# EAGLE board V0p2_Main_PCB2 (EAGLE 6.4)
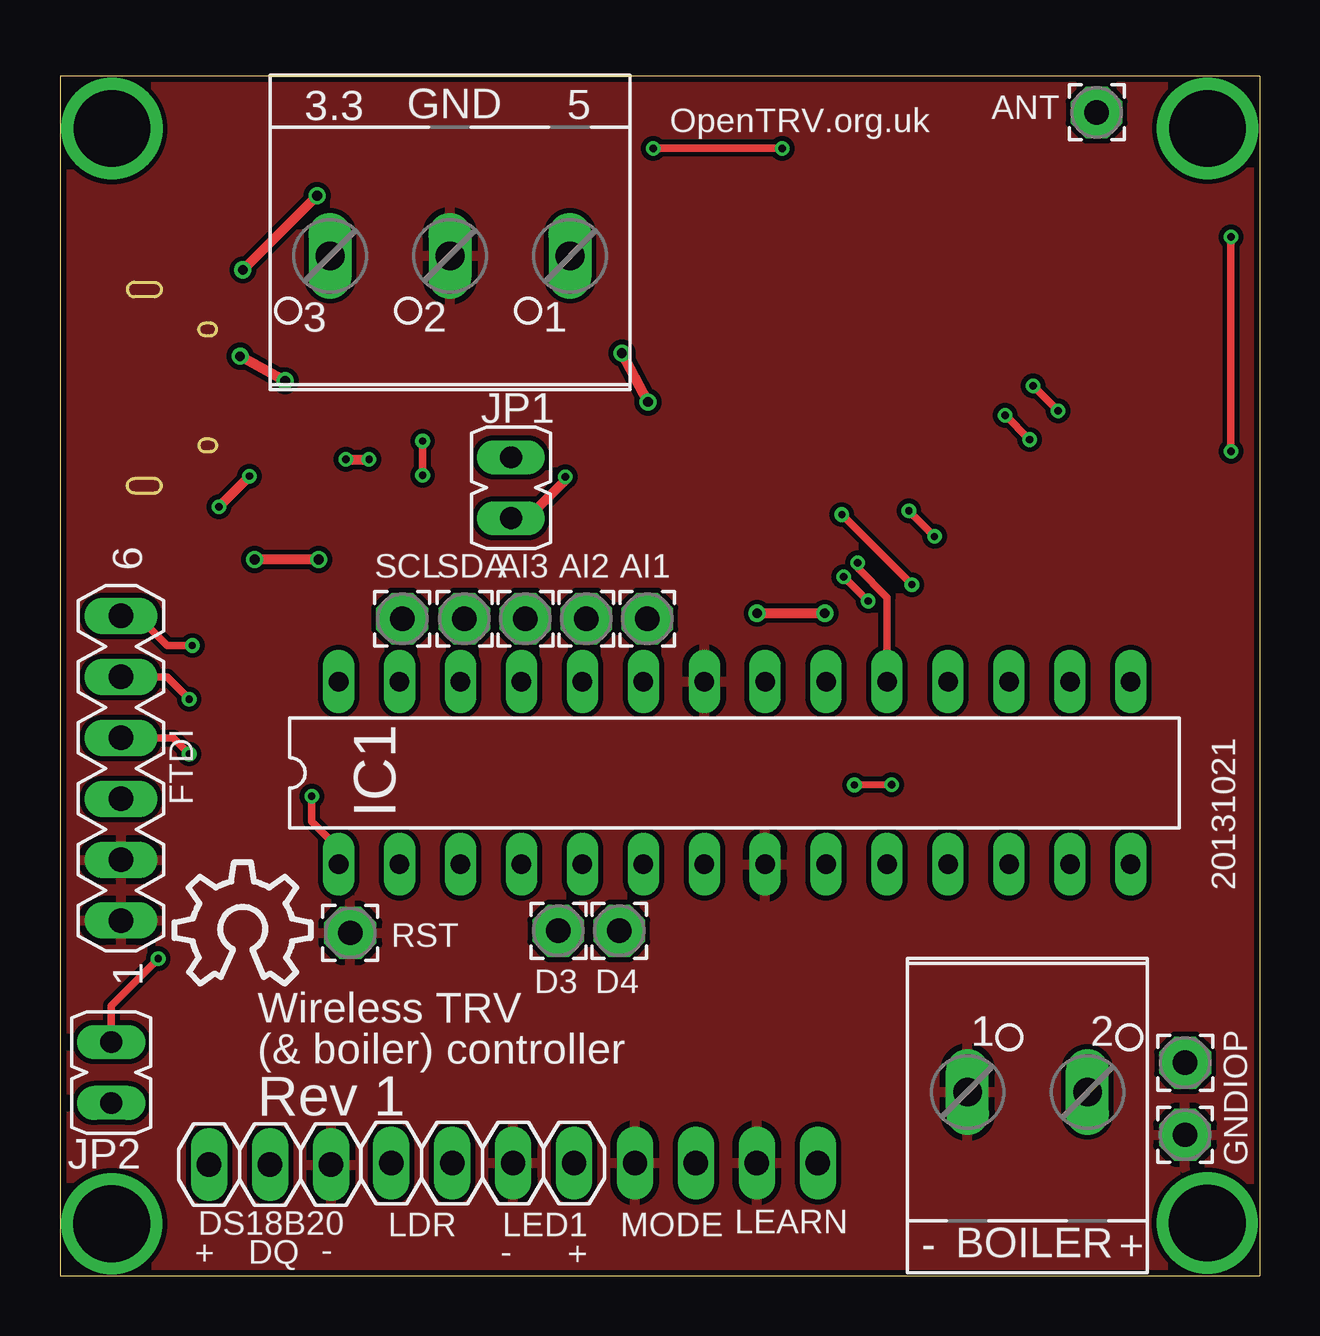
[diagram p0: board, top side]
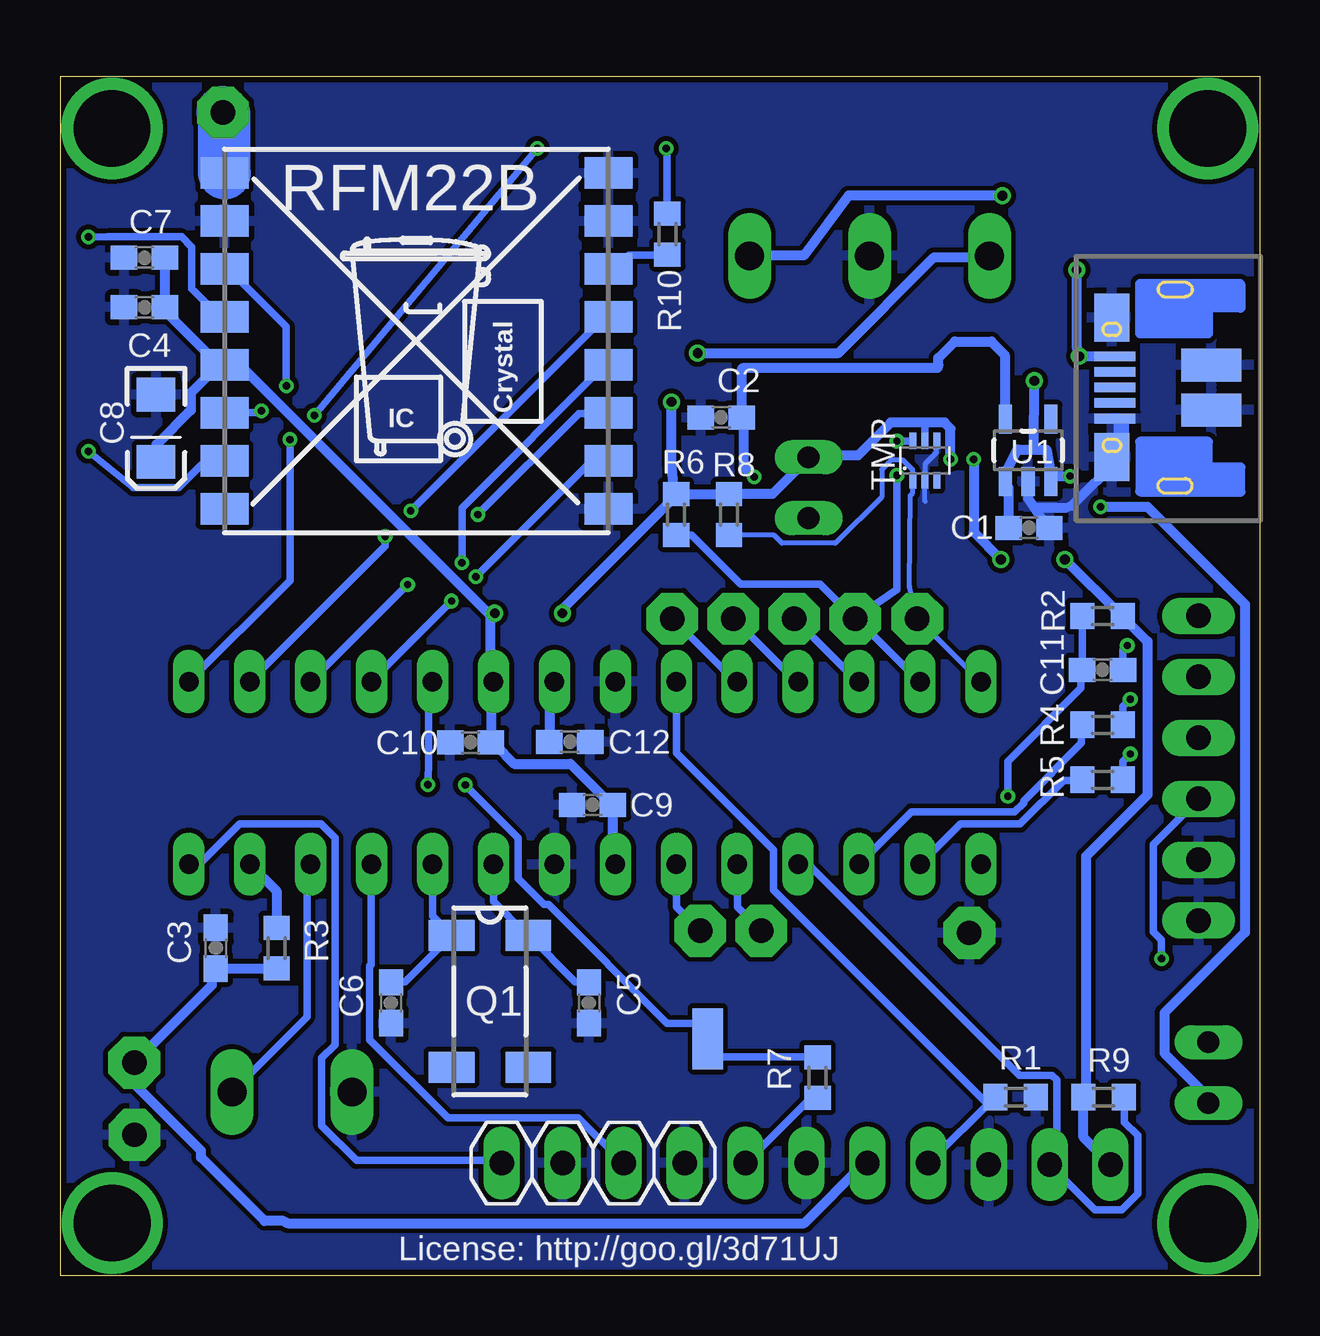
[diagram p1: board, bottom side, seen from below]

Size 50 x 50 mm. Coordinates in mm from the lower left corner, seen from the top.
Outline: 0,0 50,0 50,50 0,50 0,0
Copper layers (1*16): Top 0.035mm / dielectric 1.5mm / Bottom 0.035mm
Design rules "PMServicesStd": minimum track width 8mil, minimum drill 12mil, track to track 8mil, track to pad 8mil, pad to pad 8mil, via to via 8mil, smd to smd 0mil, copper to edge 10mil, drill to drill 10mil, minimum pad ring 10mil, minimum via ring 6mil, stop-mask expansion 2mil, vias tented up to drill 100mil, thermal gap 10mil
Net classes: 0 default: width 0.305 mm; 1 supply: width 0.406 mm, clearance 0.203 mm; 2 mains: width 1.626 mm, clearance 4.064 mm; 3 ant: width 2.184 mm; 4 tmp: width 0.152 mm

## Footprints (pad centres in the part's own frame; a part is rotated, then mirrored left to right if it is on the bottom)
2,15/1,0 = drill 1.016 pad 2.159 octagon: 1 0,0
SCREWTERMINAL = drill 1.194 long: 1 -2.5,0; 2 2.5,0
0603-CAP = smd 1.1 x 1: 1 -0.85,0; 2 0.85,0
EIA3216 = smd 1.4 x 1.6: A 1.4,0; C -1.4,0
1X03 = drill 1.016 long: 1 -2.54,0; 2 0,0; 3 2.54,0
MA06-1 = drill 1.016 long: 1 -6.35,0; 2 -3.81,0; 3 -1.27,0; 4 1.27,0; 5 3.81,0; 6 6.35,0
DIL28-3 = drill 0.813 long: 1 -16.51,-3.81; 2 -13.97,-3.81; 3 -11.43,-3.81; 4 -8.89,-3.81; 5 -6.35,-3.81; 6 -3.81,-3.81; 7 -1.27,-3.81; 8 1.27,-3.81; 9 3.81,-3.81; 10 6.35,-3.81; 11 8.89,-3.81; 12 11.43,-3.81; 13 13.97,-3.81; 14 16.51,-3.81; 15 16.51,3.81; 16 13.97,3.81; 17 11.43,3.81; 18 8.89,3.81; 19 6.35,3.81; 20 3.81,3.81; 21 1.27,3.81; 22 -1.27,3.81; 23 -3.81,3.81; 24 -6.35,3.81; 25 -8.89,3.81; 26 -11.43,3.81; 27 -13.97,3.81; 28 -16.51,3.81
JP1 = drill 0.914 long: 1 0,-1.27; 2 0,1.27
1X02 = drill 1.016 long: 1 -1.27,0; 2 1.27,0
SCREWTERMINAL' = drill 1.194 long: 1 -2.5,0; 2 2.5,0; 3 7.5,0
MC-306 = smd 1.3 x 1.9: 1 -2.75,-1.6; 2 2.75,-1.6; 3 2.75,1.6; 4 -2.75,1.6
R0603 = smd 1 x 1.1: 1 -0.85,0; 2 0.85,0
RFM22-XXX-S2 = smd 2 x 1.3: 1 -8,7; 2 -8,5; 3 -8,3; 4 -8,1; 5 -8,-1; 6 -8,-3; 7 -8,-5; 8 -8,-7; 9 8,-7; 10 8,-5; 11 8,-3; 12 8,-1; 13 8,1; 14 8,3; 15 8,5; 16 8,7
SHORT_TOP-50 = smd 1.27 x 1.27: 1 0.635,0; 2 -0.635,0
TMP112 = smd 0.285 x 0.7: 1 -0.5,-0.825; 2 0,-0.825; 3 0.5,-0.825; 4 0.5,0.825; 5 0,0.825; 6 -0.5,0.825
TC1185 = smd 0.55 x 1.2: 1 -0.95,-1.3; 2 0,-1.3; 3 0.95,-1.3; 4 0.95,1.3; 5 -0.95,1.3
MICRO-USB-FCI-10103592 = smd 0.4 x 1.71: 1 3.84,2.51; 2 3.19,2.51; 3 2.54,2.51; 4 1.89,2.51; 5 1.24,2.51 | smd 2 x 1.46: 7 -0.36,2.64; 17 5.44,2.64 | smd 1.375 x 2.5: 11 1.603,-1.52; 12 3.478,-1.52

## Placement (x,y rotation side)
AI1  [2,15/1,0]  24.48,27.38 0 top
AI2  [2,15/1,0]  21.94,27.38 0 top
AI3  [2,15/1,0]  19.4,27.38 0 top
ANT  ANT (86 mm)  [2,15/1,0]  43.21,48.49 180 top
BOILER  [SCREWTERMINAL]  40.32,7.66 0 top
C1  10uF 10V  [0603-CAP]  9.61,31.17 0 bottom
C2  10uF 10V  [0603-CAP]  22.44,35.77 0 bottom
C3  100nF  [0603-CAP]  43.51,13.65 270 bottom
C4  100pF  [0603-CAP]  46.48,40.37 180 bottom
C5  0pF  [0603-CAP]  27.95,11.37 270 bottom
C6  0pF  [0603-CAP]  36.2,11.37 270 bottom
C7  100nF  [0603-CAP]  46.48,42.43 0 bottom
C8  100uF  [EIA3216]  45.99,35.32 270 bottom
C9  100nF  [0603-CAP]  27.8,19.63 180 bottom
C10  100nF  [0603-CAP]  32.88,22.23 180 bottom
C11  100nF  [0603-CAP]  6.54,25.25 0 bottom
C12  100nF  [0603-CAP]  28.75,22.25 0 bottom
D3  [2,15/1,0]  20.77,14.37 0 top
D4  [2,15/1,0]  23.31,14.37 0 top
DS18B20  [1X03]  8.75,4.62 0 top
FTDI  FTDI  [MA06-1]  2.54,21.15 90 top
GND  [2,15/1,0]  46.89,5.87 0 top
IC1  ATMEGA328P-PU  [DIL28-3]  28.12,20.95 0 top
IOP  [2,15/1,0]  46.9,8.88 0 top
JP1  [JP1]  18.8,32.84 0 top
JP2  [JP1]  2.13,8.46 180 top
LDR  [1X02]  15.07,4.7 0 top
LEARN  [1X02]  30.32,4.7 0 bottom
LED1  [1X02]  20.16,4.7 0 top
MODE  [1X02]  25.23,4.7 0 bottom
POWER  [SCREWTERMINAL']  18.76,42.51 180 top
Q1  32768Hz  [MC-306]  32.08,11.43 270 bottom
R1  100K  [R0603]  10.17,7.44 0 bottom
R2  10K  [R0603]  6.54,27.5 180 bottom
R3  330R  [R0603]  40.97,13.65 270 bottom
R4  10K  [R0603]  6.54,22.96 0 bottom
R5  10K  [R0603]  6.54,20.67 0 bottom
R6  4K7  [R0603]  24.32,31.73 270 bottom
R7  470R  [R0603]  18.43,8.26 270 bottom
R8  4K7  [R0603]  22.11,31.73 90 bottom
R9  4.7K  [R0603]  6.5,7.44 180 bottom
R10  1K  [R0603]  24.68,43.41 270 bottom
RFM22B  RFM22SMD  [RFM22-XXX-S2]  35.14,38.96 0 bottom
RST  [2,15/1,0]  12.1,14.29 270 top
SCL  [2,15/1,0]  14.26,27.38 0 top
SDA  [2,15/1,0]  16.86,27.38 0 top
SH1  SHORT-HT5  [SHORT_TOP-50]  23,9.88 90 bottom
TMP  TMP112  [TMP112]  13.95,33.97 0 bottom
U1  TC1185SMD  [TC1185]  9.65,34.4 0 bottom
U$1  [OSHW_10X200_NOTEXT]  4.77,12.16 0 top
U$2  [TONNE]  35.31,36.2 0 bottom
USBPOWER  MICRO-USB-FCI-10103592  [MICRO-USB-FCI-10103592]  3.52,34.48 90 bottom

## Library data of the parts
AI1-AI3 ANT D3 D4 GND IOP RST SCL SDA = wirepad
BOILER = screwterminal_new
C1-C12 = SparkFun-Passives
DS18B20 LDR LEARN LED1 MODE = pinhead
FTDI = FTDI; OC_FARNELL: unknown; OC_NEWARK: unknown
IC1 = Arduino-AVR
JP1 JP2 = jumper
POWER = screwterminal3_new
Q1 = crystal; MPN: MC-306 60.0KHZ 100PPM ,12.5PF; OC_FARNELL: 1278040; OC_NEWARK: 31M5576
R1-R10 = resistor
RFM22B = SparkFun-RF
SH1 = shorts; BOM: no
TMP = TMP112
U1 = 3.3VREG
U$1 = ohw-logo
U$2 = logo
USBPOWER = micro-usb-fci-10103592

## Nets
5V [supply]: C1.1 JP2.2 POWER.1 U1.1 U1.3 USBPOWER.1
AI1: AI1.1 IC1.24
AI2: AI2.1 IC1.25
AI3: AI3.1 IC1.26
BOILER: BOILER.2 IC1.12
BUTTON_LEARN_L: IC1.14 LEARN.1
BUTTON_MODE_L: IC1.11 MODE.1
D2: DS18B20.2 IC1.4 R9.1
D3: D3.1 IC1.5
D4: D4.1 IC1.6
GND [tmp]: BOILER.1 C1.2 C2.1 C3.1 C4.2 C5.2 C6.2 C7.1 C8.C C9.2 C10.2 C12.2 DS18B20.3 FTDI.1 FTDI.2 GND.1 IC1.8 IC1.22 LEARN.2 LED1.1 MODE.2 POWER.2 R1.2 RFM22B.2 RFM22B.9 RFM22B.15 RFM22B.16 RST.1 TMP.2 TMP.4 U1.2 USBPOWER.5 USBPOWER.7 USBPOWER.11 USBPOWER.12 USBPOWER.17
IO_POWER [supply]: C3.2 IOP.1 LDR.2 R3.2
IO_POWER_UP [supply]: IC1.13 R3.1
LDR: IC1.23 LDR.1 R1.1
LED_HEATCALL: R7.1 SH1.2
LEDEXT: LED1.2 R7.2
N$1: C11.2 FTDI.6
N$3: FTDI.4 R5.2
N$5: FTDI.5 R4.2
N$6 [supply]: C12.1 IC1.21
N$7: R10.2 RFM22B.14
N$8 [supply]: C2.2 JP1.1 U1.5
N$11: FTDI.3 JP2.1
N$20: RFM22B.3 RFM22B.6
N$21: RFM22B.4 RFM22B.7
N$26 [ant]: ANT.1 RFM22B.1
RESET: C11.1 IC1.1 R2.2
RFM_IRQ: IC1.15 R10.1
RX: IC1.3 R4.1
SCL [tmp]: IC1.28 R8.1 SCL.1 TMP.1
SDA: IC1.27 R6.2 SDA.1 TMP.6
SPI_MISO: IC1.18 RFM22B.10
SPI_MOSI: IC1.17 RFM22B.11
SPI_NSS: IC1.16 RFM22B.13
SPI_SCK: IC1.19 RFM22B.12 SH1.1
TX: IC1.2 R5.1
VCC [supply]: C4.1 C7.2 C8.A C9.1 C10.1 DS18B20.1 IC1.7 IC1.20 JP1.2 POWER.3 R2.1 R6.1 R8.2 R9.2 RFM22B.5 TMP.5
XTAL1: C5.1 IC1.9 Q1.4
XTAL2: C6.1 IC1.10 Q1.1

## Tracks (layer width: path | path; a pad name or v marks a point on that pad's centre or on a via)
5V  (via drill 0.3, 0.41)
  Top 0.406: v9.38,37.3 v7.5,38.32 | v7.62,41.92 v10.72,45.02 | v7.9,33.33 v6.63,32.05
  Bottom 0.406: C1.1 10.46,31.19 10.46,32.84 10.59,32.97 U1.1 10.52,33.17 10.52,33.58 10.08,34.44 9.4,34.44 | 9.4,34.44 8.88,34.42 8.71,33.5 8.71,32.99 U1.3 8.53,33.33 v7.9,33.33 | 9.4,34.44 v9.38,37.3 | USBPOWER.1 6.11,38.32 v7.5,38.32 7.59,38.51 7.62,38.71 v7.62,41.92 | v10.72,45.02 17.13,45.02 19,42.52 21.23,42.52 POWER.1 | v6.63,32.05 4.67,32.05 0.61,27.99 0.61,14.3 3.96,10.95 3.96,9.27 2.13,7.44 2.13,7.21 JP2.2
AI1
  Bottom 0.305: IC1.24 21.84,24.77 24.46,27.38 AI1.1
AI2
  Bottom 0.305: IC1.25 19.3,24.77 21.92,27.38 AI2.1
AI3
  Bottom 0.305: IC1.26 16.76,24.77 19.38,27.38 AI3.1
BOILER
  Bottom 0.305: 39.57,17.14 IC1.12 | 39.65,17.02 IC1.12 | IC1.12 39.7,16.87 39.7,10.79 42.82,7.67 BOILER.2
BUTTON_LEARN_L
  Bottom 0.305: LEARN.1 31.73,4.8 37.64,4.8 39.09,6.25 39.09,9.07 38.53,9.63 38.53,18.24 39.12,18.82 42.52,18.82 44.2,17.14 IC1.14
BUTTON_MODE_L
  Bottom 0.305: IC1.11 37.03,17.14 37.03,12.95 37.08,12.9 37.08,9.83 33.83,6.58 28.4,6.58 26.52,4.7 MODE.1
D2
  Bottom 0.305: R9.1 5.64,6.4 5.08,5.84 5.08,3.4 5.74,2.74 6.86,2.74 8.74,4.62 DS18B20.2 8.46,4.55 8.46,8.15 8.66,8.36 10.01,8.36 18.8,17.14 IC1.4
D3
  Bottom 0.305: IC1.5 21.77,15.37 D3.1
D4
  Bottom 0.305: IC1.6 24.31,15.37 D4.1
GND
  Bottom 0.203: 13.95,32.27 13.95,33.13 TMP.2 13.92,33.25 13.92,33.86 13.46,34.31 13.46,34.77 TMP.4 | 9.65,32.41 9.65,32.61 9.65,32.97 U1.2 9.55,32.61 9.53,32.61 9.53,32.25 9.32,32 | 5.85,34.07 5.56,34.07 5.56,34.5 5.79,34.77 5.79,35.81 5.67,35.82 5.67,34.83 5.66,34.7 5.69,34.7 5.56,34.48 5.56,35.55 5.96,35.52 5.97,34.63 5.66,34.72 5.55,34.29 5.55,34.24 5.79,34.24 5.79,34.09 5.63,33.8 5.63,34.18 5.82,34.75 6,34.75 | 5.59,33.98 USBPOWER.7
  Bottom 0.406: 9.65,32.41 9.07,31.53 C1.2 | 9.32,32 8.08,32 7.83,32.09 5.85,34.07
  pour Bottom: 0,0 50,0 50,50 41.17,49.96 38,50 0,50
  pour Top: 0,50 0,0 50,0 50,50 42.6,50.02 39.28,50.03
IO_POWER
  Bottom 0.406: R3.2 43.48,12.8 C3.2 | 43.61,12.62 C3.2 | LDR.2 16.36,4.67 16.48,4.67 18.97,2.18 40.51,2.18 40.69,2.29 41.48,2.29 44.12,4.93 44.12,5.21 46.81,7.9 46.81,8.69 IOP.1 46.89,8.89 43.66,12.12 43.66,12.42 C3.2
IO_POWER_UP
  Bottom 0.406: R3.1 40.97,16.03 IC1.13
LDR
  Bottom 0.305: LDR.1 13.79,4.67 R1.1 11.43,7.24 20.27,16.08 20.27,17.75 24.31,21.79 IC1.23
LED_HEATCALL
  Bottom 0.305: R7.1 22.89,9.12 22.99,9.22 SH1.2
LEDEXT
  Bottom 0.305: R7.2 18.44,7.39 18.72,7.39 21.41,4.7 LED1.2
N$1  (via drill 0.3)
  Top 0.305: v5.51,26.26 4.47,26.26 3.25,27.48 2.54,27.48 FTDI.6
  Bottom 0.305: v5.51,26.26 5.69,26.09 C11.2
N$3  (via drill 0.3)
  Top 0.305: v5.38,21.74 4.72,22.4 2.54,22.4 FTDI.4
  Bottom 0.305: v5.38,21.74 5.69,21.44 R5.2
N$4  (via drill 3.2)
  other vias: 2.16,47.81
N$5  (via drill 0.3)
  Top 0.305: v5.38,24.03 4.47,24.94 2.54,24.94 FTDI.5
  Bottom 0.305: v5.38,24.03 5.69,23.72 R4.2
N$6
  Bottom 0.406: C12.1 29.59,24.59 29.41,24.77 IC1.21
N$7
  Bottom 0.305: 26.95,41.94 27.13,41.94 RFM22B.14 26.82,42.01 26.29,42.55 24.69,42.55 R10.2
N$8  (via drill 0.3)
  Top 0.406: v21.06,33.3 21.06,33.15 19.48,31.57 JP1.1
  Bottom 0.406: 13.39,37.92 13.39,38.02 | 13.39,38.02 13.39,38.25 12.7,38.94 11.18,38.94 10.62,38.38 10.62,35.61 U1.5 | 13.39,38.02 13.42,37.83 21.56,37.82 21.59,37.62 21.59,35.79 C2.2 21.49,35.59 21.49,33.73 v21.06,33.3
N$11  (via drill 0.3)
  Top 0.305: v4.09,13.21 2.13,11.25 2.13,9.75 JP2.1
  Bottom 0.305: v4.09,13.21 4.09,13.99 4.42,14.33 4.42,17.98 2.54,19.86 FTDI.3
N$12  (via drill 3.2)
  other vias: 47.83,2.19
N$19  (via drill 3.2)
  other vias: 47.83,47.82
N$20  (via drill 0.3)
  Top 0.305: v40.56,37.08 v41.6,36.04
  Bottom 0.305: v41.6,36.04 41.68,35.97 43.13,35.97 RFM22B.6 | v40.56,37.08 40.56,39.55 42.95,41.94 43.13,41.94 RFM22B.3
N$21  (via drill 0.3)
  Top 0.305: v48.81,43.3 v48.81,34.35
  Bottom 0.305: v48.81,34.35 46.94,32.84 45.06,32.84 43.94,33.96 43.16,33.96 RFM22B.7 | v48.81,43.3 48.01,43.31 44.93,43.31 44.5,42.88 44.5,41.15 43.33,39.98 43.16,39.98 RFM22B.4
N$22  (via drill 3.2)
  other vias: 2.16,2.16
N$26
  Bottom 2.184: RFM22B.1 43.16,45.97 43.16,48.41 43.2,48.46 ANT.1
RESET  (via drill 0.3)
  Top 0.305: v10.49,19.99 10.49,18.92 11.61,17.8 IC1.1
  Bottom 0.305: R2.2 7.39,27.48 C11.1 7.44,25.09 7.44,24.49 10.49,21.44 v10.49,19.99
RFM_IRQ  (via drill 0.3)
  Top 0.305: v30.1,46.99 v24.73,46.99 | v40.41,34.85 v39.4,35.87
  Bottom 0.305: v39.4,35.87 v30.1,46.99 | v40.41,34.85 40.41,28.98 IC1.15 | R10.1 24.69,44.27 24.69,46.86 v24.73,46.99
RX
  Bottom 0.305: R4.1 7.42,22.94 7.42,22.2 9.83,19.79 9.83,19.71 10.21,19.33 14.5,19.33 IC1.3
SCL
  Bottom 0.203: IC1.28 11.63,24.77 14.2,27.33 SCL.1 14.28,27.41 14.58,28.74 14.56,32.52 14.45,32.62 14.45,33.13 TMP.1 14.45,33.25 14.45,33.58 14.86,33.98 15.37,33.98 15.75,33.6 15.75,32.46 17.68,30.53 19.91,30.53 20.24,30.86 22.1,30.86 R8.1
SDA  (via drill 0.3)
  Top 0.305: v15.11,33.36 v15.11,34.78
  Bottom 0.254: 14.57,34.78 TMP.6
  Bottom 0.305: v15.11,34.78 14.57,34.78 | v15.11,33.36 15.11,28.59 16.84,27.41 SDA.1 | IC1.27 14.17,24.77 16.74,27.33 SDA.1 | R6.2 24.31,30.86 23.67,30.86 21.64,28.83 18.31,28.83 16.97,27.48 SDA.1
SPI_MISO  (via drill 0.3)
  Top 0.305: v33.68,28.12 v32.66,29.13
  Bottom 0.305: v32.66,29.13 27.84,33.96 27.15,33.96 RFM22B.10 | v33.68,28.12 37.03,24.77 IC1.18
SPI_MOSI  (via drill 0.3)
  Top 0.305: v35.51,28.8 v32.59,31.73
  Bottom 0.305: v32.59,31.73 28.37,35.94 27.15,35.94 RFM22B.11 | v35.51,28.8 IC1.17
SPI_NSS  (via drill 0.3)
  Top 0.305: v36.45,30.81 v35.38,31.88
  Bottom 0.305: v35.38,31.88 27.3,39.95 27.15,39.95 RFM22B.13 | v36.45,30.81 36.45,30.4 IC1.16
SPI_SCK  (via drill 0.3)
  Top 0.305: v34.66,20.46 v33.11,20.45 | v33.25,29.72 33.25,29.49 34.47,28.27 IC1.19
  Bottom 0.305: v33.11,20.45 30.91,18.24 30.91,16.56 29.82,15.47 29.64,15.47 24.69,10.52 23.01,10.52 SH1.1 | v34.66,20.46 34.65,21.57 34.65,24.61 34.49,24.77 IC1.19 | v33.25,29.72 33.25,32 27.3,37.95 27.15,37.95 RFM22B.12
TX
  Bottom 0.305: R5.1 7.42,20.65 8.15,20.65 9.98,18.82 12.47,18.82 IC1.2
VCC  (via drill 0.3, 0.41)
  Top 0.406: v10.78,29.85 v8.11,29.85 | v11.91,34.02 v12.88,34.02 | v29.06,27.61 v31.88,27.61 | v24.51,36.42 v23.42,38.46
  Bottom 0.305: TMP.5 13.95,35.56
  Bottom 0.406: C7.2 45.64,42.42 45.64,40.39 C4.1 45.57,40.16 43.51,38.1 RFM22B.5 | C8.A 45.97,33.93 45.97,34.65 44.55,36.07 44.55,36.78 43.38,37.95 43.16,37.95 RFM22B.5 | IC1.7 26.87,17.14 26.95,17.22 26.95,19.61 C9.1 27.13,19.74 28.73,21.34 31.06,21.34 31.85,22.12 C10.1 32.03,24.69 31.95,24.77 IC1.20 32.05,24.94 32.05,27.51 | 32.05,27.51 42.39,37.85 42.95,37.85 RFM22B.5 | DS18B20.1 6.22,4.65 7.34,5.77 R9.2 7.24,7.62 7.24,17.48 4.67,20.04 4.67,26.44 5.56,27.33 R2.1 5.71,27.51 5.77,27.51 v8.11,29.85 | v10.78,29.85 11.91,30.99 v11.91,34.02 | v31.88,27.61 32.05,27.51 | 11.28,42.49 POWER.3 11.48,42.44 13.56,42.44 17.55,38.46 v23.42,38.46 | R6.1 24.31,32.59 22.12,32.59 R8.2 21.92,32.59 20.3,32.59 18.8,34.09 JP1.2 18.59,34.19 16.74,34.19 15.37,35.56 13.95,35.56 13.13,35.56 12.88,35.31 12.88,34.21 v12.88,34.02 | v24.51,36.42 24.51,33.85 24.41,32.77 R6.1 | R6.1 24.43,32.41 29.06,27.79 v29.06,27.61
XTAL1
  Bottom 0.305: C5.1 27.96,12.24 28.52,12.24 30.45,14.17 Q1.4 30.61,14.28 31.93,15.6 IC1.9
XTAL2
  Bottom 0.305: C6.1 36.2,12.24 35.61,12.24 Q1.1 33.78,14.3 34.47,14.99 IC1.10

## Text on the board
bPlace: License: http://goo.gl/3d71UJ
tNames: 3.3 | GND | 5 | OpenTRV.org.uk | 20131021 | Wireless TRV | (& boiler) controller | Rev 1 | DQ | - | - | + | - | + | +